# EAGLE board amp_soha (EAGLE 6.4)
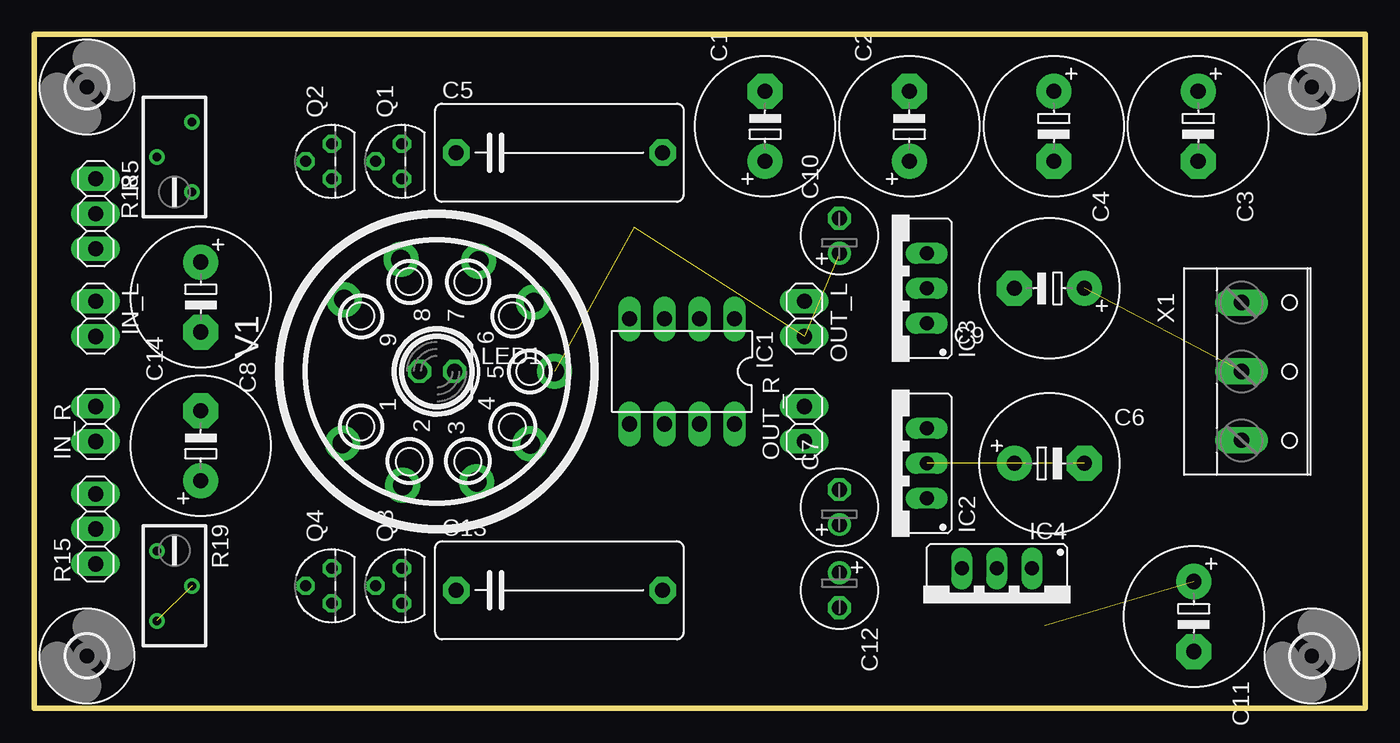
[diagram p0: board, top side]
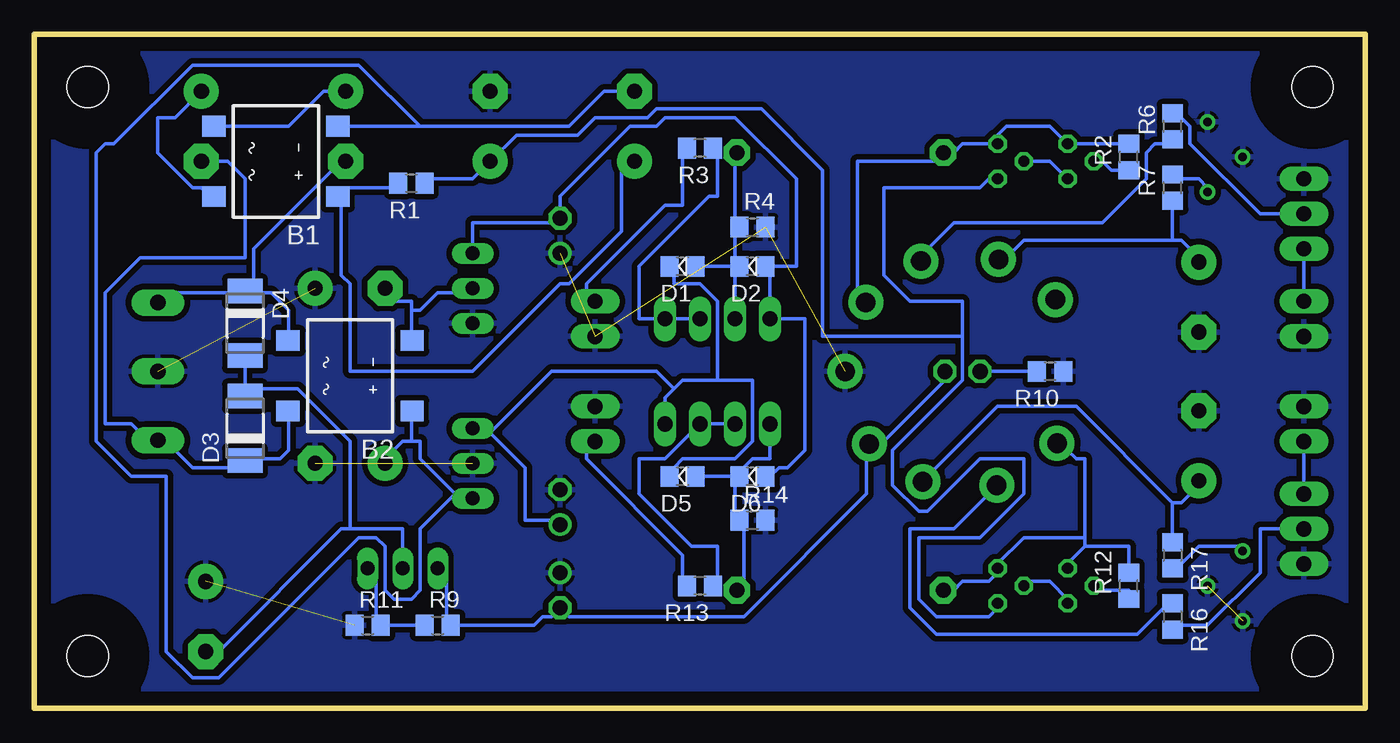
[diagram p1: board, bottom side, seen from below]

Size 96.57 x 48.89 mm. Coordinates in mm from the lower left corner, seen from the top.
Outline: 0,0 0,48.89 96.57,48.89 96.57,0 0,0
Copper layers (1*16): Top 0.035mm / dielectric 1.5mm / Bottom 0.035mm
Design rules "default": minimum track width 10mil, minimum drill 24mil, track to track 8mil, track to pad 8mil, pad to pad 8mil, via to via 8mil, smd to smd 8mil, copper to edge 40mil, drill to drill 8mil, minimum pad ring 10mil, minimum via ring 8mil, stop-mask expansion 4mil, vias tented up to drill 0mil, thermal gap 10mil

## Footprints (pad centres in the part's own frame; a part is rotated, then mirrored left to right if it is on the bottom)
DFS = smd 1.5 x 1.7: + -2.55,-4.5; - 2.55,-4.5; AC1 -2.55,4.5; AC2 2.55,4.5
E5-10,5 = drill 1.1 pad 2.54: + -2.54,0 | drill 1.1 pad 2.54 octagon: - 2.54,0
C150-072X183 = drill 1.1 pad 1.93 octagon: 1 -7.493,0; 2 7.493,0
E2,5-6 = drill 1.1: + -1.27,0 | drill 1.1 pad 1.6 octagon: - 1.27,0
D0805 = smd 1.3 x 1.5: A -0.95,0; K 0.95,0
DO-214AC = smd 1.778 x 2.54: A 2.342,0; C -2.342,0
DIL08 = drill 1.1 long: 1 -3.81,-3.81; 2 -1.27,-3.81; 3 1.27,-3.81; 4 3.81,-3.81; 5 3.81,3.81; 6 1.27,3.81; 7 -1.27,3.81; 8 -3.81,3.81
78XXS = drill 1.016 long: GND 0,-2.54; IN -2.54,-2.54; OUT 2.54,-2.54
79XXS = drill 1.016 long: GND -2.54,-2.54; IN 0,-2.54; OUT 2.54,-2.54
337TS = drill 1.016 long: 1 -2.54,-2.54; 2 0,-2.54; 3 2.54,-2.54
1X02 = drill 1.1 pad 1.778 long: 1 -1.27,0; 2 1.27,0
LED5MM = drill 1.1 pad 1.676 octagon: A -1.27,0; K 1.27,0
TO92 = drill 0.813 octagon: 1 1.27,0; 2 0,1.905; 3 -1.27,0
R0805 = smd 1.3 x 1.5: 1 -0.95,0; 2 0.95,0
1X03 = drill 1.1 pad 1.778 long: 1 -2.54,0; 2 0,0; 3 2.54,0
RTRIM3296Y = drill 0.61: 1 1.27,-2.54; 2 -1.27,0; 3 1.27,2.54
3,0 = hole 3: 0,0
NOVAL = drill 1.422 pad 2.54: 1 5.207,-6.858; 2 8.254,-2.484; 3 8.004,2.893; 4 5.258,6.77; 5 0,8.524; 6 -5.004,7.024; 7 -8.004,3.02; 8 -8.127,-2.611; 9 -5.207,-6.731
W237-103 = drill 1.1 pad 1.93 long: 1 -5,-1.29; 2 0,-1.29; 3 5,-1.29

## Placement (x,y rotation side)
B1  DF01S  [DFS]  79.06,39.69 90 bottom
B2  DF01S  [DFS]  73.66,24.13 90 bottom
C1  100uF/100V  [E5-10,5]  53.02,42.23 90 top
C2  100uF/100V  [E5-10,5]  63.5,42.23 90 top
C3  100uF/100V  [E5-10,5]  84.45,42.23 270 top
C4  100uF/100V  [E5-10,5]  73.98,42.23 270 top
C5  1uF/100V  [C150-072X183]  38.1,40.32 0 top
C6  470uF/35V  [E5-10,5]  73.66,17.78 0 top
C7  47uF/16V  [E2,5-6]  58.42,14.6 90 top
C8  1000uF/10V  [E5-10,5]  12.06,29.84 270 top
C9  470uF/35V  [E5-10,5]  73.66,30.48 180 top
C10  47uF/16V  [E2,5-6]  58.42,34.29 90 top
C11  470uF/35V  [E5-10,5]  84.14,6.67 270 top
C12  47uF/16V  [E2,5-6]  58.42,8.57 270 top
C13  1uF/100V  [C150-072X183]  38.1,8.57 0 top
C14  1000uF/10V  [E5-10,5]  12.06,19.05 90 top
D1  1N4148  [D0805]  49.53,32.07 180 bottom
D2  1N4148  [D0805]  44.45,32.07 180 bottom
D3  ES1  [DO-214AC]  81.28,20.32 90 bottom
D4  ES1  [DO-214AC]  81.28,27.94 270 bottom
D5  1N4148  [D0805]  49.53,16.83 180 bottom
D6  1N4148  [D0805]  44.45,16.83 180 bottom
IC1  OPA2134PA  [DIL08]  46.99,24.45 180 top
IC2  7812  [78XXS]  62.23,17.78 90 top
IC3  7912  [79XXS]  62.23,30.48 90 top
IC4  [337TS]  69.85,7.62 180 top
IN_L  [1X02]  4.45,28.26 270 top
IN_R  [1X02]  4.45,20.64 90 top
LED1  [LED5MM]  29.21,24.45 0 top
OUT_L  [1X02]  55.88,28.26 270 top
OUT_R  [1X02]  55.88,20.64 90 top
Q1  J113  [TO92]  26.67,39.69 90 top
Q2  J113  [TO92]  21.59,39.69 90 top
Q3  J113  [TO92]  26.67,8.89 90 top
Q4  J113  [TO92]  21.59,8.89 90 top
R1  2k2  [R0805]  69.22,38.1 180 bottom
R2  360  [R0805]  17.14,40.01 90 bottom
R3  150  [R0805]  48.26,40.64 180 bottom
R4  100k  [R0805]  44.45,34.92 0 bottom
R5  100k  [1X03]  4.45,35.88 270 top
R6  300  [R0805]  13.97,42.23 90 bottom
R7  560  [R0805]  13.97,37.78 90 bottom
R9  1k3  [R0805]  67.31,6.03 0 bottom
R10  [R0805]  22.86,24.45 180 bottom
R11  11k  [R0805]  72.39,6.03 0 bottom
R12  360  [R0805]  17.14,8.89 90 bottom
R13  150  [R0805]  48.26,8.89 180 bottom
R14  100k  [R0805]  44.45,13.65 0 bottom
R15  100k  [1X03]  4.45,13.02 90 top
R16  300  [R0805]  13.97,6.67 270 bottom
R17  560  [R0805]  13.97,11.11 270 bottom
R18  [RTRIM3296Y]  10.16,40.01 0 top
R19  [RTRIM3296Y]  10.16,8.89 180 top
U$1  [3,0]  3.81,3.81 0 top
U$2  [3,0]  3.81,45.09 0 top
U$3  [3,0]  92.71,3.81 0 top
U$4  [3,0]  92.71,45.09 0 top
V1  [NOVAL]  29.21,24.45 270 top
X1  [W237-103]  88.9,24.45 270 top

## Library data of the parts
B1 B2 C1-C14 D1-D6 IC1-IC4 IN_L IN_R LED1 OUT_L OUT_R Q1-Q4 R1-R7 R9-R19 U$1-U$4 V1 X1 = amp_soha

## Nets
+12V: C7.+ D1.K D5.K IC1.8 IC2.OUT
+24V: C2.+ Q1.3 Q3.3 R1.1
-12.6V: C12.- IC4.3 LED1.K R9.2 V1.4
-12V: C10.- D2.A D6.A IC1.4 IC3.OUT
AGND: C2.- C6.- C7.- C8.- C9.+ C10.+ C11.+ C12.+ C14.- IC2.GND IC3.GND IN_L.2 IN_R.2 OUT_L.2 OUT_R.2 R4.2 R5.1 R10.1 R11.1 R14.2 R15.1 R18.2 R18.3 R19.2 R19.3 V1.5 X1.2
N$1: B2.AC1 C3.- D3.C X1.3
N$2: B2.AC2 C4.- D4.C X1.1
N$3: C11.- D3.A D4.A IC4.2
N$4: IC4.1 R9.1 R11.2
N$5: B2.- C9.- IC3.IN
N$6: B1.- B2.+ C1.- C6.+ IC2.IN
N$7: LED1.A R10.2
N$8: B1.AC1 C3.+
N$9: B1.AC2 C4.+
N$10: R16.1 V1.2
N$11: B1.+ C1.+ R1.2
N$12: IN_L.1 R5.3
N$13: R5.2 R6.2
N$14: R6.1 V1.7
N$15: C8.+ R7.1 V1.8
N$16: Q2.2 R2.1
N$17: R7.2 R18.1
N$18: R17.2 R19.1
N$19: C5.1 Q1.1 Q2.1 R2.2 V1.6
N$20: Q1.2 Q2.3
N$22: C5.2 D1.A D2.K IC1.3 R4.1
N$24: IC1.1 IC1.2 R3.1
N$25: OUT_L.1 R3.2
N$26: IN_R.1 R15.3
N$27: R15.2 R16.2
N$29: C14.+ R17.1 V1.3
N$31: C13.1 Q3.1 Q4.1 R12.2 V1.1
N$32: Q4.2 R12.1
N$33: Q3.2 Q4.3
N$34: C13.2 D5.A D6.K IC1.5 R14.1
N$35: IC1.6 IC1.7 R13.1
N$36: OUT_R.1 R13.2

## Tracks (layer width: path | path; a pad name or v marks a point on that pad's centre or on a via)
+12V
  Bottom 0.254: 63.5,20 64.77,20 IC2.OUT 63.5,20 | 63.5,20 60.96,17.46 60.96,13.65 58.42,13.65 C7.+ | 46.99,23.81 49.53,23.81 50.16,23.18 | 46.99,23.81 44.45,23.81 44.45,19.37 45.72,18.1 49.53,18.1 50.16,17.46 50.16,16.83 D5.K | 50.16,23.18 50.8,22.54 IC1.8 | 46.99,23.81 46.99,29.53 48.26,30.8 50.16,30.8 50.16,32.07 D1.K | 63.5,20 59.05,24.45 51.44,24.45 50.16,23.18
+24V
  Bottom 0.254: R1.1 67.94,38.42 64.77,38.42 C2.+ 61.59,41.59 57.15,41.59 55.88,42.86 52.07,42.86 51.44,43.5 43.81,43.5 39.37,39.05 39.37,26.99 29.21,26.99 | 29.21,26.99 29.21,29.53 33.02,29.53 34.92,31.43 34.92,37.78 27.94,37.78 27.3,38.42 Q1.3 | 29.21,26.99 29.21,23.81 34.29,18.73 34.29,16.19 32.38,14.29 31.75,14.29 27.94,18.1 24.77,18.1 24.77,15.56 27.94,12.38 32.38,12.38 32.38,7.94 31.11,6.67 27.3,6.67 26.67,7.3 Q3.3
-12.6V
  Bottom 0.254: IC4.3 67.31,9.84 66.67,9.84 66.67,6.03 R9.2 60.33,6.03 59.69,6.67 59.05,6.67 C12.- 57.78,6.67 45.09,6.67 36.2,15.56 36.2,18.73 V1.4 35.56,19.37 34.92,19.37 30.48,23.81 LED1.K
-12V
  Bottom 0.254: IC3.OUT 64.77,35.24 58.42,35.24 C10.- 58.42,37.15 53.34,42.23 51.44,42.23 50.8,42.86 45.72,42.86 41.27,38.42 41.27,32.07 43.18,32.07 | D6.A 43.18,16.83 42.55,17.46 41.91,17.46 40.64,18.73 40.64,28.26 IC1.4 43.18,32.07 | 43.18,32.07 D2.A
AGND  (7 unrouted)
  pour Bottom (isolate 0.406): -2.54,-2.22 -2.54,51.12 99.06,51.12 99.06,-2.22
N$1
  Bottom 0.254: B2.AC1 78.11,21.27 78.11,18.73 78.74,18.1 81.28,18.1 D3.C 81.28,17.46 85.09,17.46 87,19.37 X1.3 87.63,20 88.9,20 89.53,20.64 91.44,20.64 91.44,30.16 88.9,32.7 81.28,32.7 81.28,38.42 82.55,39.69 C3.-
N$2
  Bottom 0.254: 81.28,30.16 79.38,30.16 78.11,28.89 78.11,26.99 B2.AC2 | 81.28,30.16 86.36,30.16 87,29.53 X1.1 | 81.28,30.16 D4.C 81.28,30.8 80.64,30.8 80.64,33.34 74.3,39.69 C4.-
N$3
  Bottom 0.254: D4.A 81.28,23.18 | IC4.2 69.85,13.02 73.66,13.02 | 73.66,13.02 74.3,13.02 83.19,4.13 C11.- | 81.28,23.18 77.47,23.18 73.66,19.37 73.66,13.02 | 81.28,23.18 D3.A
N$4
  Bottom 0.254: R9.1 R11.2 71.75,6.03 71.75,9.84 72.39,9.84 IC4.1
N$5
  Bottom 0.254: 69.22,28.89 69.22,29.53 70.48,29.53 71.12,30.16 C9.- | 69.22,28.89 69.22,26.99 B2.- | 69.22,28.89 68.58,28.89 67.31,30.16 64.77,30.16 IC3.IN
N$6
  Bottom 0.254: 69.22,19.37 69.22,21.27 B2.+ | 69.22,19.37 69.85,19.37 71.12,18.1 C6.+ | 66.04,15.56 64.77,15.56 IC2.IN 66.04,15.56 | 66.04,15.56 68.58,18.1 68.58,19.37 69.22,19.37 | 68.58,42.23 57.78,42.23 55.24,44.77 C1.- | 68.58,42.23 74.3,42.23 B1.- | 66.04,15.56 68.58,13.02 68.58,8.57 69.22,7.94 70.48,7.94 71.12,8.57 71.12,11.75 71.75,12.38 73.03,12.38 83.19,2.22 85.09,2.22 87,4.13 87,16.83 89.53,16.83 92.08,19.37 92.08,40.32 91.44,40.96 90.81,40.96 85.09,46.67 73.03,46.67 68.58,42.23
N$7
  Bottom 0.254: LED1.A R10.2
N$8
  Bottom 0.254: C3.+ 86.36,42.86 87.63,42.86 87.63,40.32 85.09,37.78 84.45,37.78 83.82,37.15 B1.AC1
N$9
  Bottom 0.254: C4.+ 75.56,44.77 78.11,42.23 83.19,42.23 B1.AC2
N$10
  Bottom 0.254: R16.1 13.97,7.3 14.61,7.3 16.51,5.4 31.11,5.4 33.02,7.3 33.02,13.02 29.84,13.02 26.67,16.19 V1.2
N$11
  Bottom 0.254: R1.2 70.48,37.78 74.3,37.78 74.93,37.15 B1.+ 74.3,36.51 74.3,31.43 73.66,30.8 73.66,24.45 64.77,24.45 58.42,30.8 57.78,30.8 53.98,34.61 53.98,39.69 C1.+
N$12
  Bottom 0.254: R5.3 IN_L.1
N$13
  Bottom 0.254: R5.2 7.62,35.88 12.7,40.96 12.7,42.23 13.34,42.86 13.97,42.86 R6.2
N$14
  Bottom 0.254: R6.1 13.97,40.96 15.24,40.96 15.88,40.32 15.88,38.42 19.05,35.24 29.84,35.24 32.38,32.7 V1.7
N$15
  Bottom 0.254: 13.97,33.97 R7.1 | 13.97,33.97 13.34,33.97 12.06,32.7 C8.+ | 13.97,33.97 24.77,33.97 26.04,32.7 V1.8
N$16
  Bottom 0.254: Q2.2 19.05,39.69 18.41,39.05 R2.1
N$17
  Bottom 0.254: R7.2 13.97,38.42 12.06,38.42 11.43,37.78 R18.1
N$18
  Bottom 0.254: R17.2 13.97,10.48 13.34,10.48 12.06,11.75 8.89,11.75 R19.1
N$19
  Bottom 0.254: R2.2 Q2.1 22.86,42.23 26.04,42.23 27.3,40.96 | 27.3,40.96 29.21,40.96 29.84,40.32 30.48,40.32 | 27.3,40.96 Q1.1 | 30.48,40.32 31.11,39.69 36.83,39.69 36.83,29.53 V1.6 | 30.48,40.32 C5.1
N$20
  Bottom 0.254: Q2.3 22.86,39.69 Q1.2
N$22
  Bottom 0.254: D1.A 45.72,32.07 | C5.2 45.72,40.32 45.72,35.24 R4.1 45.72,34.61 45.72,32.07 | 45.72,32.07 IC1.3 | 45.72,32.07 D2.K
N$24
  Bottom 0.254: R3.1 46.99,40.32 46.99,37.15 47.62,37.15 52.7,32.07 52.7,28.26 IC1.1 IC1.2
N$25
  Bottom 0.254: OUT_L.1 56.52,29.53 56.52,30.8 50.8,36.51 49.53,36.51 49.53,40.32 R3.2
N$26
  Bottom 0.254: IN_R.1 R15.3
N$27
  Bottom 0.254: R15.2 7.62,13.02 7.62,9.84 11.43,6.03 13.97,6.03 R16.2
N$29
  Bottom 0.254: 13.97,14.92 R17.1 | 13.97,14.92 13.34,14.92 12.06,16.19 C14.+ | 13.97,14.92 20.95,21.91 26.67,21.91 31.75,16.83 V1.3
N$31
  Bottom 0.254: C13.1 29.84,8.57 29.21,9.21 27.3,9.21 26.67,9.84 Q3.1 26.67,10.48 24.77,12.38 20.32,12.38 | R12.2 17.14,11.75 20.32,11.75 | 20.32,11.75 21.59,10.48 Q4.1 | 20.32,12.38 20.32,18.1 20.95,18.1 21.59,18.73 22.23,18.73 V1.1 | 20.32,12.38 20.32,11.75
N$32
  Bottom 0.254: R12.1 17.14,8.57 19.68,8.57 Q4.2
N$33
  Bottom 0.254: Q4.3 21.59,7.94 22.86,9.21 24.77,9.21 Q3.2
N$34
  Bottom 0.254: 45.72,16.83 45.72,13.65 R14.1 45.09,13.65 45.09,8.57 C13.2 | 45.72,16.83 D5.A | IC1.5 43.18,18.1 44.45,18.1 45.72,16.83 | 45.72,16.83 D6.K
N$35
  Bottom 0.254: R13.1 46.99,9.21 46.99,11.75 48.9,11.75 52.7,15.56 52.7,18.1 50.8,18.1 IC1.7 IC1.6
N$36
  Bottom 0.254: OUT_R.1 56.52,19.37 56.52,18.1 49.53,11.11 49.53,9.21 R13.2